# Altium PCB miaow-foc-board.pcbdoc (part 6 of 10)
Units mil, origin at the board's own origin, x right, y up, seen from the top; angles counter-clockwise.
Board outline 2755.91 x 3149.61 mil, 6 copper layers (SIG1, GND2, SIG3, PWR4, GND5, SIG6), stack 60.566 mil thick; 437 components, 392 nets, 2120 pads, 1697 vias.
Unrouted connection lines stored in the file: 1090.
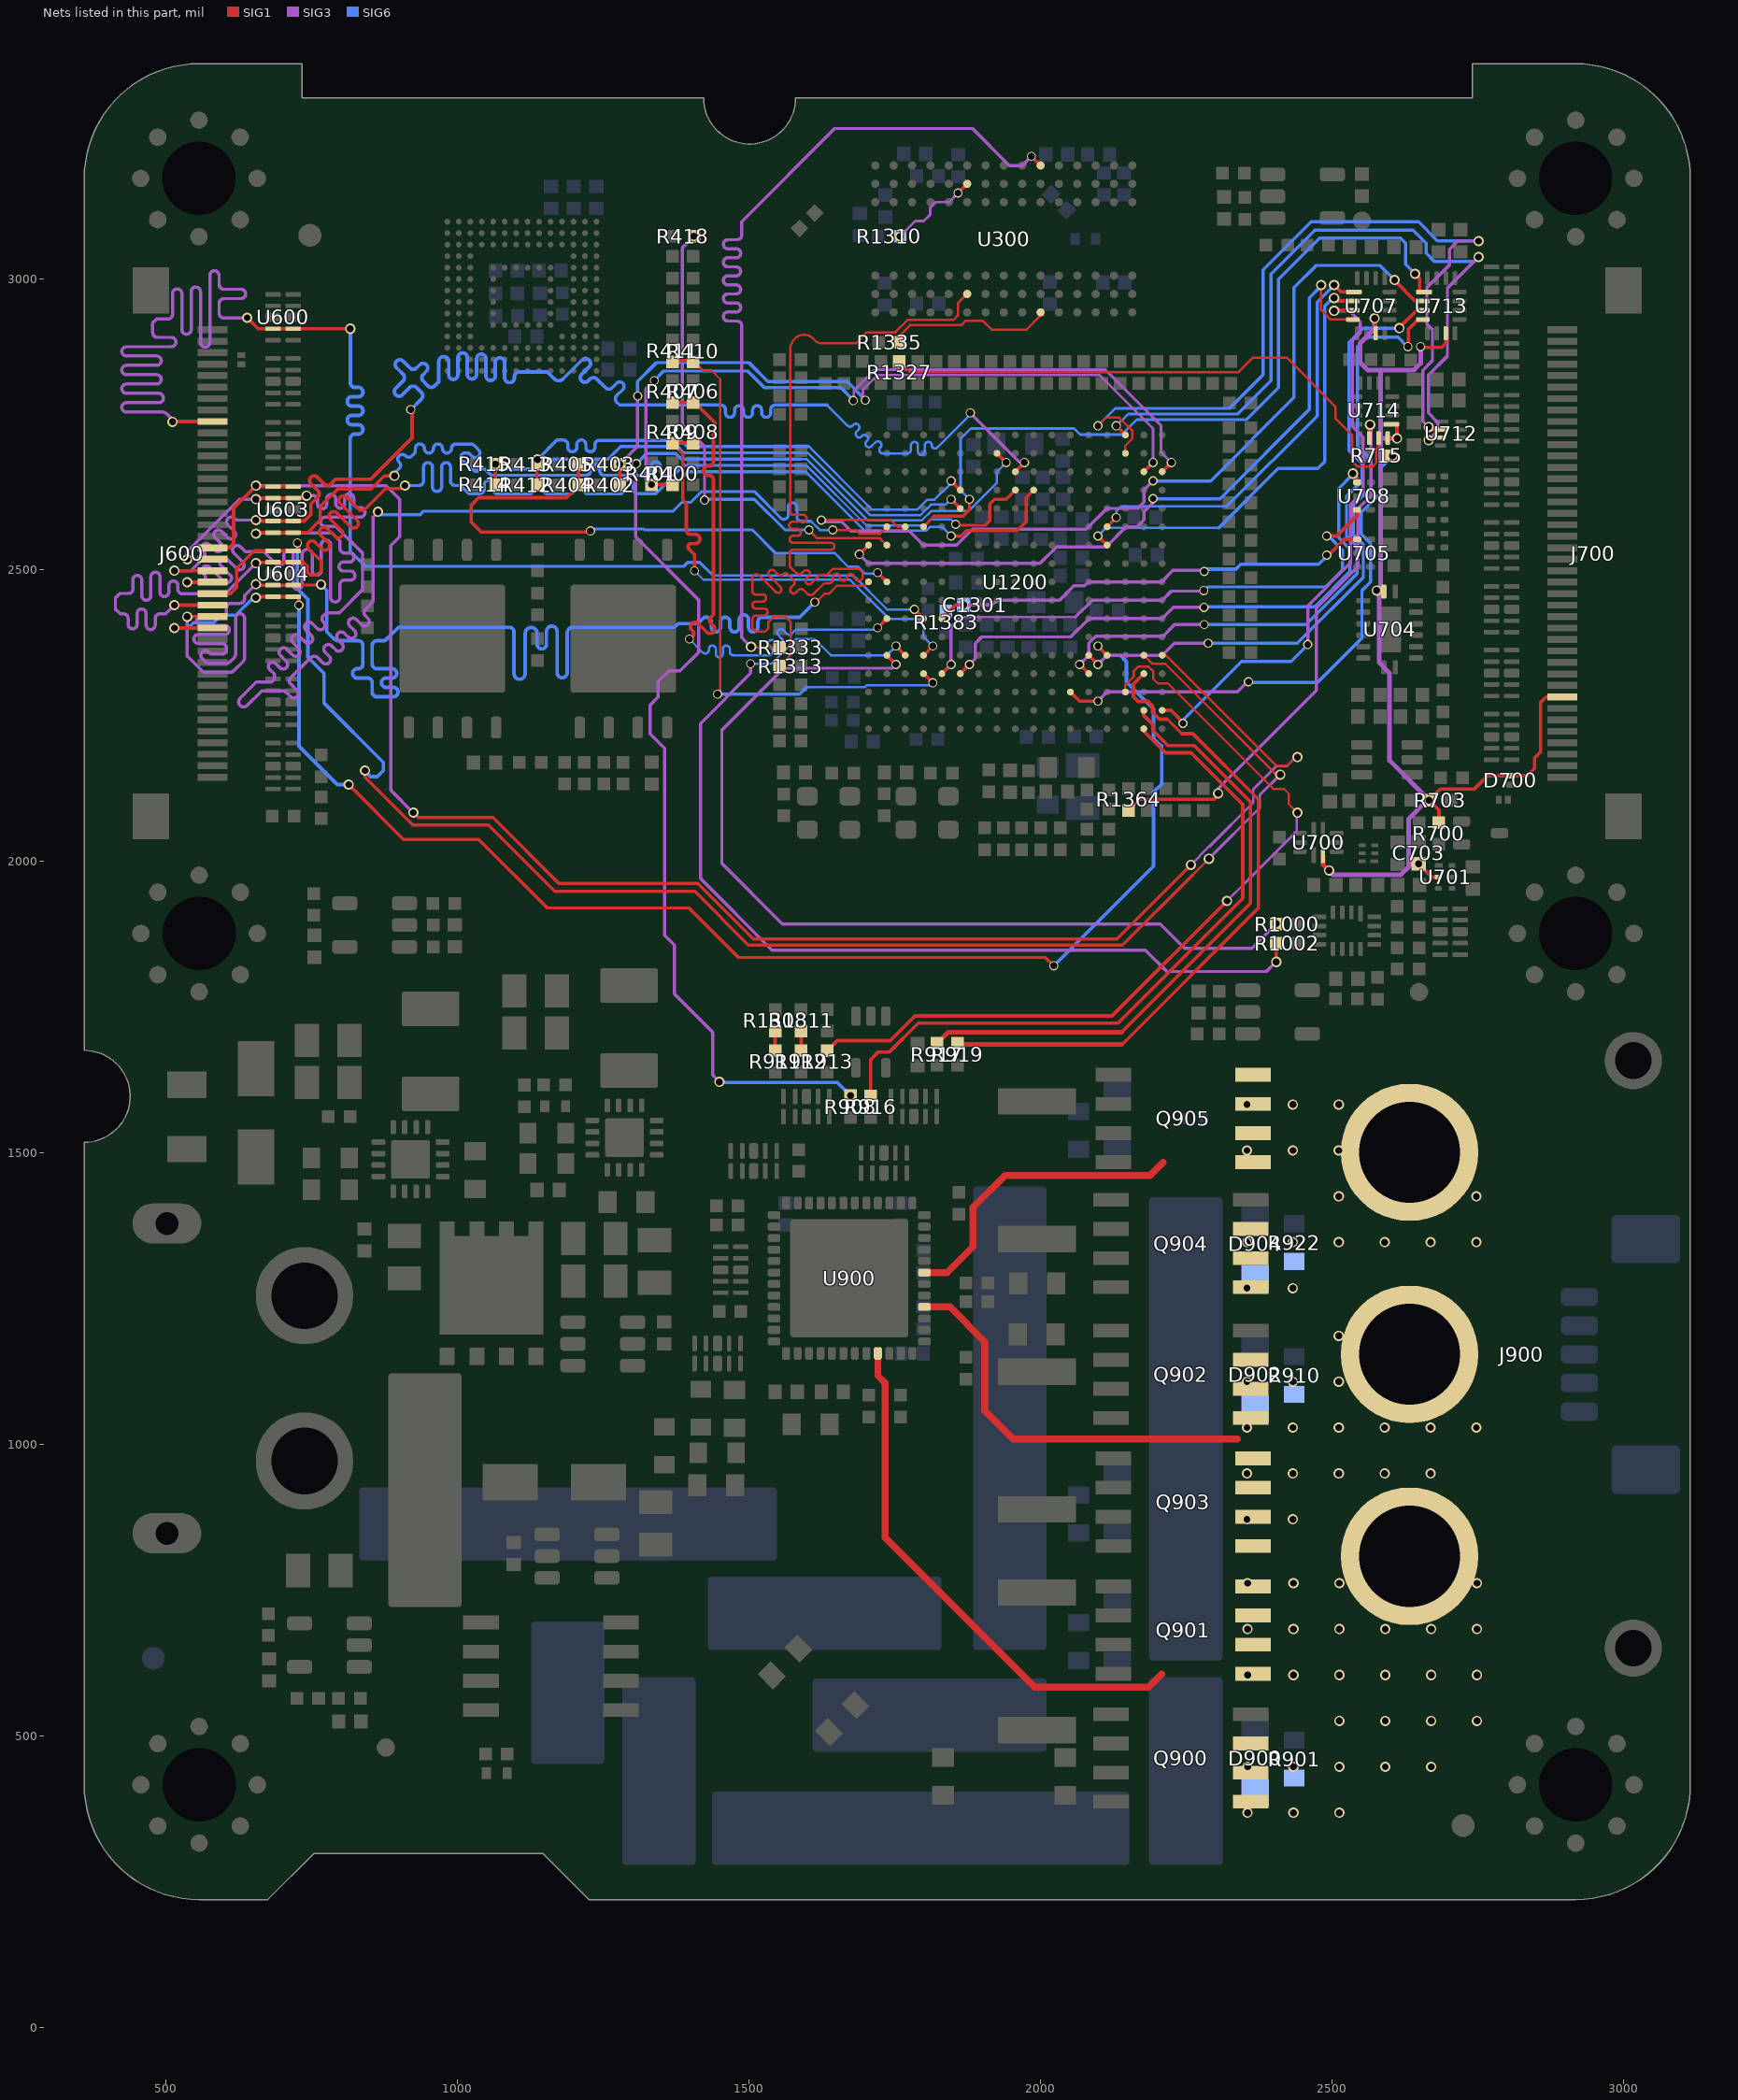
[diagram p9: the nets of this part, all layers, seen from the top]

## Via types
v1: diameter 17.72, hole 11.81, SIG1 to SIG6, tented both sides, 1223 vias
v2: diameter 15.75, hole 11.81, SIG1 to SIG6, tented both sides, 453 vias
v3: diameter 17.72, hole 11.81, SIG1 to SIG6, tented top, 21 vias

## Nets (pads, with @x,y where several pads share a name; then routed paths per layer and width w, separated by ;. In a path a pad name is that pad's centre, name@x,y a point inside that pad or via, vN(x,y) a via of type N, cw(c..) or ccw(c..) an arc to the next point about the centre after c; other vN are vias at no path point) (continued)
DBG_A_RX: U707.3 U1200.U2 | length 1007.7
  SIG1 w6: U1200.U2@2209.03,2259.35 2224.25,2259.35 2244.76,2238.83 v2(2244.76,2237.09) ; v1(2504.05,2944.6) 2505.21,2945.76 U707.3@2536.08,2945.76
  SIG3 w5.5: v2@2458.82,2375.27 2458.82,2438.84 2532.22,2512.24 2532.22,2612.87 2553.93,2634.58 2553.93,2728.3 2535.49,2746.75 2535.49,2893.67 2548.84,2907.03 2548.84,2926.16 2530.41,2944.6 v1(2504.05,2944.6)
  SIG6 w5.5: v2(2244.76,2237.09) 2245.87,2238.2 2245.87,2243.88 2345.59,2343.6 2430.15,2343.6 v2(2458.82,2372.27)
DBG_A_TX: U707.4 U1200.A11 | length 1248.8
  SIG1 w4: v1@2482.85,2988.22 2485.57,2985.5 2481.85,2981.77 2481.85,2946.38 2498.22,2930.01 U707.4@2536.08,2930.01
  SIG1 w6: v2(1689.34,2527.07) U1200.A11@1705.09,2542.81
  SIG3 w5.5: v2(1689.34,2527.07) 1705.03,2511.38 1999.37,2511.38 2027.86,2539.86 2112.52,2539.86 2147.23,2574.57 2166.5,2574.57 2177.97,2586.04 2177.97,2599.66 2193.28,2614.97 v2@2193.28,2621.55
  SIG6 w5.5: v2(2193.28,2622.55) 2308.55,2622.55 2461.76,2775.77 2461.76,2967.13 v1@2482.85,2988.22
  other v1: 2481.85,2988.94
DBG_B_RX: U707.1 U1200.P12 | length 721.1
  SIG1 w6: U1200.P12@2114.54,2574.31 v2(2130.29,2590.06) ; v1(2504.05,2988.94) 2515.74,2977.25 U707.1@2538.05,2977.25
  SIG6 w4: v2(2130.29,2590.06) 2130.29,2601.04 2138.33,2609.09 2319.72,2609.09
  SIG6 w5.5: 2319.72,2609.09 2474.98,2764.35 2474.98,2959.87 v1(2504.05,2988.94)
DBG_B_TX: U707.2 U1200.P11 | length 789.5
  SIG1 w6: v2(2098.79,2558.56) U1200.P11@2114.54,2542.81 ; v1@2503.09,2965.79 2503.09,2963.74 2504.94,2961.89 2534.04,2961.89 2535.25,2960.68 U707.2@2536.08,2961.51
  SIG6 w4: v2(2098.79,2558.56) 2112.41,2572.17 2305.85,2572.17
  SIG6 w5.5: 2305.85,2572.17 2407.79,2674.12 2476.28,2674.12 2488.2,2686.04 2488.2,2952.98 2498.86,2963.64 2503.09,2963.64 v1@2503.09,2965.79
  other v1: 2504.05,2966.79
DBG_C_RX: U713.3 U1200.N4 | length 1148.8
  SIG1 w6: v2(2067.3,2338.09) U1200.N4@2083.05,2322.34 ; v1(2616.04,2915.11) 2616.04,2915.96 2645.83,2945.76 U713.3@2656.37,2945.76
  SIG3 w5.5: v2(2067.3,2338.09) 2083.05,2353.84 2083.05,2374.39 2095.26,2386.61 2210.31,2386.61 2230.31,2406.61 v2(2281.27,2406.61)
  SIG6 w5.5: v2(2281.27,2406.61) 2456.14,2406.61 2543.1,2493.57 2543.1,2540.52 2525.27,2558.35 2525.27,2625.94 2551.74,2652.41 2551.74,2683.15 2529.86,2705.02 2529.86,2890.96 2553.84,2914.94 v1@2615.87,2914.94
DBG_C_TX: U713.4 U1200.N5 | length 1126
  SIG1 w6: U1200.N5@2083.05,2353.84 v2(2098.79,2338.09) ; v2(2630.62,2883.42) 2631.55,2884.35 2631.55,2912.99 2648.57,2930.01 U713.4@2656.37,2930.01
  SIG3 w5.5: v2(2098.79,2338.09) 2114.54,2353.84 2209.03,2353.84 2229.68,2374.48 v2(2287.94,2374.48)
  SIG6 w5.5: v2(2287.94,2374.48) 2440.84,2374.48 2554.13,2487.78 2554.13,2544 2537.15,2560.98 2537.15,2611 2567.76,2641.61 2567.76,2688.96 2544.12,2712.59 2544.12,2883.27 2560.19,2899.33 2613.67,2899.33 v2@2630.21,2882.79
DBG_D_RX: U713.1 U1200.D12 | length 1347.3
  SIG1 w5.5: U1200.D12@1799.58,2574.31 1818.09,2592.82 1867.43,2592.82 1878.32,2603.71 v2(1878.32,2621.55)
  SIG1 w6: v1(2642.86,3008.36) 2650.59,3000.64 2650.59,2977.81 2657.78,2977.81 U713.1@2658.34,2977.25
  SIG6 w4.5: v2(1878.32,2621.55) 1863.05,2636.83 1863.05,2725.49 1880.56,2743 2058.14,2743 2068.61,2732.53 2139.84,2732.53 2165.55,2758.23 2353.89,2758.23
  SIG6 w5.5: 2353.89,2758.23 2408.87,2813.21 2408.87,2999.32 2479.09,3069.54 2617.92,3069.54 2626.73,3060.72 2626.73,3024.49 v1(2642.86,3008.36)
DBG_D_TX: U713.2 U1200.C12 | length 1547.7
  SIG1 w4: v2@1624.38,2585.94 1743.28,2585.94 1754.91,2574.31 U1200.C12@1768.08,2574.31
  SIG1 w6: v1(2607.93,2997.51) 2607.64,2997.51 2607.64,2996.86 2642.99,2961.51 U713.2@2657.86,2961.51
  SIG3 w5.5: v2(1624.2,2585.76) 1626.8,2583.15 1658.87,2583.15 1674.8,2567.22 1775.18,2567.22 1799.58,2542.81 1856.44,2542.81 1883.43,2569.81 2078.54,2569.81 2114.54,2605.81 2167.27,2605.81 2177.87,2616.4 2177.87,2637.64 v2(2193.28,2653.05)
  SIG6 w5.5: v2(2193.28,2653.05) 2292.16,2653.05 2435.32,2796.21 2435.32,2984.4 2473.57,3022.65 2582.79,3022.65 v1(2607.93,2997.51)
DBG_MISO: R715.2 U1200.M3 | length 899.9
  SIG1 w6: U1200.M3@2051.55,2290.85 2067.3,2275.1 v2(2098.79,2275.1)
  SIG3 w5.5: v2(2098.79,2275.1) 2114.54,2290.85 2338.21,2290.85 v2@2355.84,2308.48
  SIG6 w5.5: v2@2356.06,2308.48 2357.33,2307.21 2475.62,2307.21 2551.78,2383.37 2551.78,2464.66 2566.88,2479.77 2566.88,2545.74 2550.84,2561.78 2550.84,2598.76 2583.96,2631.89 2583.96,2675.33 v1(2604.39,2695.76)
  other v2: 2357.06,2308.48
DBG_MOSI: R1364.2 U714.14 | length 933.8
  SIG1 w6: R1364.2@2151.4,2087.88 2170.45,2106.92 2298.62,2106.92 2305.4,2113.7 2305.4,2116.67 v1(2305.07,2117) ; U714.14@2564.63,2726.44 2564.63,2749.32 2564.81,2749.51 v1(2565.74,2749.51)
  SIG3 w5.5: v1(2305.07,2117) 2305.07,2125 2473.71,2293.63 2473.71,2434.55 2544.94,2505.77 2544.94,2605.22 2567.08,2627.36 2567.08,2748.16 v1(2565.74,2749.51)
DBG_SCL: U712.2 U1200.R16 | length 1443.3
  SIG1 w4: v2(2098.79,2747.54) 2112.97,2761.71 2135.12,2761.71 2157.95,2738.88 2157.95,2725.62 2146.04,2713.71 U1200.R16@2146.04,2700.29 ; v1(2666.04,2745.63) 2665.16,2744.75 v1@2668.85,2741.06
  SIG1 w6: v1@2668.85,2741.06 U712.2@2678.6,2741.06
  SIG3 w5.5: v1(2666.04,2745.63) 2656.08,2755.59 2656.08,2843 2672.78,2859.7 2672.78,2912.74 2663.15,2922.37 2663.15,2984.68 2701.93,3023.46 2701.93,3050.48 2715.82,3064.36 v1(2751.96,3064.36)
  SIG6 w4: v1@2751.73,3064.81 2752.07,3064.47 v1(2751.96,3064.36)
  SIG6 w4.5: v2(2098.79,2747.54) 2128.67,2777.42 2324.73,2777.42
  SIG6 w5.5: 2324.73,2777.42 2382.43,2835.12 2382.43,3015.18 2464.57,3097.31 2649,3097.31 2681.5,3064.81 v1@2751.73,3064.81
DBG_SCLK: R1327.2 U714.15 | length 998.7
  SIG1 w4: R1327.2@1757.78,2857.96 1775.98,2839.76 2340.3,2839.76 2364.99,2864.45 2422.46,2864.45 2506.83,2780.08 2506.83,2760.03 2534.98,2731.88 2534.98,2686.39 2543.44,2677.93 2570.38,2677.93 2576.16,2683.72 2576.16,2707.41 2577.14,2708.39 2577.28,2708.39 2579.79,2710.9 2579.79,2725.85 U714.15@2580.37,2726.44
DBG_SDA: U712.3 U1200.R17 | length 1299.5
  SIG1 w6: v2(2130.29,2747.54) U1200.R17@2146.04,2731.79 ; v1@2668.85,2727.28 U712.3@2678.6,2727.28
  SIG3 w5.5: v1(2666.04,2722.7) 2682.29,2738.95 2682.29,2753.2 2665.65,2769.84 2665.65,2834.4 2698.46,2867.21 2698.46,2983.65 v1(2751.96,3037.15)
  SIG6 w4.5: v2(2130.29,2747.54) 2150.69,2767.94 2338.8,2767.94
  SIG6 w5.5: 2338.8,2767.94 2395.65,2824.8 2395.65,3007.89 2471.19,3083.43 2639.67,3083.43 2661.99,3061.11 2661.99,3043.64 2675.97,3029.65 2744.46,3029.65 v1(2751.96,3037.15)
DE: J600.9 U600.2 U600.9 U1200.D7 | length 3247.2
  SIG1 w6: v1(510.97,2754.35) 511.52,2754.9 J600.9@579.29,2754.9 ; v1@638.97,2932.31 641.19,2932.31 641.19,2930.5 657.65,2914.05 U600.9@683.32,2914.05 U600.2@717.77,2914.05 815.34,2914.05 v1@815.78,2914.48 ; v2(1783.83,2432.58) U1200.D7@1799.58,2416.83
  SIG3 w5.5: v1(510.97,2754.35) 510.97,2758.09 501.83,2767.23 ccw(c492.17,2757.57) 492.17,2771.23 431.86,2771.23 cw(c431.86,2779.23) 431.86,2787.23 487.26,2787.23 ccw(c487.26,2795.23) 487.26,2803.23 431.86,2803.23 cw(c431.86,2811.23) 431.86,2819.23 483.55,2819.23 ccw(c483.55,2827.23) 483.55,2835.23 431.86,2835.23 cw(c431.86,2843.23) 431.86,2851.23 483.55,2851.23 ccw(c483.55,2859.23) 483.55,2867.23 431.86,2867.23 cw(c431.86,2875.23) 431.86,2883.23 508.76,2883.23 ccw(c508.76,2891.23) 508.76,2899.23 484.91,2899.23 cw(c484.91,2907.23) 476.91,2907.23 476.91,2924.14 483.53,2930.76 502.86,2930.76 ccw(c502.86,2938.76) 510.86,2938.76 510.86,2974.49 cw(c518.86,2974.49) 526.86,2974.49 526.86,2912.61 ccw(c534.86,2912.61) 542.86,2912.61 542.86,2977.67 cw(c550.86,2977.67) 558.86,2977.67 558.86,2890.53 ccw(c566.86,2890.53) 574.86,2890.53 574.86,3005.56 cw(c582.86,3005.56) 590.86,3005.56 590.86,2989.77 ccw(c598.86,2989.77) 598.86,2981.77 628.38,2981.77 cw(c628.38,2973.77) 628.38,2965.77 598.86,2965.77 ccw(c598.86,2957.77) 590.86,2957.77 590.86,2940.67 ccw(c599.11,2940.67) 599.11,2932.41 638.57,2932.41 v1(638.97,2932.81)
  SIG6 w4: 1437.82,2491.5 1437.82,2491 1678.41,2491 1736.84,2432.58 v2(1783.83,2432.58)
  SIG6 w5: 1415.53,2513.29 1437.32,2491.5 1437.82,2491.5
  SIG6 w5.5: 815.78,2532.58 842,2506.35 1387.97,2506.35 1394.91,2513.29 1415.53,2513.29
  SIG6 w6: 815.78,2532.58 815.78,2725.39 cw(c823.78,2725.39) 823.78,2733.39 829.72,2733.39 ccw(c829.72,2741.39) 829.72,2749.39 818.78,2749.39 cw(c818.78,2757.39) 818.78,2765.39 829.72,2765.39 ccw(c829.72,2773.39) 829.72,2781.39 818.78,2781.39 cw(c818.78,2789.39) 818.78,2797.39 829.72,2797.39 ccw(c829.72,2805.39) 829.72,2813.39 823.78,2813.39 cw(c823.78,2821.24) 815.93,2821.24 v1@815.93,2913.89
  other v1: 815.78,2914.05
DM0: R1333.2 U300.K9 | length 1638
  SIG1 w4: v1(1503.53,2368.23) 1503.53,2367.84 1504.32,2367.05 R1333.2@1552.33,2367.05
  SIG1 w6: v2(1984.62,3209.93) U300.K9@2000.37,3194.18
  SIG3 w5.5: v1(1503.53,2368.23) 1503.33,2368.03 1487.49,2383.88 1487.49,2885.81 1487.49,2919.56 ccw(c1479.74,2919.56) 1479.74,2927.31 1463.81,2927.31 cw(c1463.81,2935.06) 1463.81,2942.81 1477.97,2942.81 ccw(c1477.97,2950.56) 1477.97,2958.31 1463.81,2958.31 cw(c1463.81,2966.06) 1463.81,2973.81 1477.97,2973.81 ccw(c1477.97,2981.56) 1477.97,2989.31 1463.81,2989.31 cw(c1463.81,2997.06) 1463.81,3004.81 1477.97,3004.81 ccw(c1477.97,3012.56) 1477.97,3020.31 1463.81,3020.31 cw(c1463.81,3028.06) 1463.81,3035.81 1477.97,3035.81 ccw(c1477.97,3043.56) 1477.97,3051.31 1463.81,3051.31 cw(c1463.81,3059.06) 1463.81,3066.81 1479.74,3066.81 ccw(c1479.74,3074.56) 1487.49,3074.56 1487.49,3097.68 1647.37,3257.57 1883.64,3257.57 1947.02,3194.18 1968.87,3194.18 v2(1984.62,3209.93)
DM1: R1335.2 U300.K1 | length 286.9
  SIG1 w4: R1335.2@1759.67,2889.49 1759.67,2903.5 1776.48,2920.31 1864.4,2920.31 1872.04,2927.96 1901.01,2927.96 1916.49,2912.47 1976.24,2912.47 2000.37,2936.6 U300.K1@2000.37,2942.21
DM2: R1310.2 U300.F8 | length 159.7
  SIG1 w6: v2(1858.64,3146.94) U300.F8@1874.38,3162.69
  SIG3 w4.5: v1(1759.07,3072.42) 1785.44,3098.79 1799.82,3098.79 1810.78,3109.75 1810.78,3121.75 1820.22,3131.19 1842.89,3131.19 v2(1858.64,3146.94)
DM3: R1313.2 U300.F2 | length 1842.8
  SIG1 w4: R1313.2@1552.04,2335.11 1571.64,2354.71 1571.64,2410.82 1562.62,2419.84 1542.33,2419.84 1533.53,2411.04 1533.53,2400.35 1527.69,2394.5 1511.46,2394.5 1506.04,2399.92 1506.04,2416.07 cw(c1512.04,2416.07) 1512.04,2422.07 1526.03,2422.07 ccw(c1526.03,2428.07) 1526.03,2434.07 1511.85,2434.07 cw(c1511.85,2440.07) 1511.85,2446.07 1523.51,2446.07 ccw(c1523.51,2452.07) 1523.51,2458.07 1512.04,2458.07 cw(c1512.04,2464.07) 1506.04,2464.07 1506.04,2487 cw(c1512.65,2486.27) 1517.36,2490.98 1539.9,2468.43 1545.57,2462.76 ccw(c1549.82,2467) 1553.98,2471.33 1539.9,2485.4 1535.13,2490.17 cw(c1539.37,2494.42) 1539.9,2500.4 cw(c1539.37,2494.42) 1543.62,2498.66 1549.59,2492.69 ccw(c1553.83,2496.93) 1558.07,2492.69 ; 1558.17,2492.78 cw(c1562.41,2488.54) 1566.65,2492.78 1576.55,2482.88 cw(c1572.31,2478.64) 1576.55,2474.4 1572.27,2470.11 ccw(c1576.51,2465.87) 1580.75,2461.63 1585.04,2465.91 cw(c1589.28,2461.67) 1593.52,2465.91 1599.73,2459.71 ccw(c1605.69,2465.67) 1611.65,2459.71 1629.43,2477.49 1637.72,2477.49 ccw(c1637.72,2483.92) 1644.15,2483.92 1644.15,2488.22 cw(c1650.15,2488.22) 1656.15,2488.22 1656.15,2487.52 ccw(c1662.15,2487.52) 1662.15,2481.52 ccw(c1662.15,2487.52) 1668.15,2487.52 1668.15,2487.63 cw(c1674.15,2487.63) 1680.15,2487.63 1680.15,2487.52 1686.09,2481.58 1690.51,2481.58 1694.88,2485.95 1694.88,2495.97 1688.58,2502.27 1644.13,2502.27 1633.26,2491.4 1621.23,2491.4 1607.25,2477.41 cw(c1603,2481.65) 1598.76,2485.9 1602.58,2489.71 ccw(c1598.33,2493.96) 1594.09,2498.2 1590.39,2494.5 cw(c1586.15,2498.74) 1581.91,2494.5 1571.52,2504.88 cw(c1575.77,2509.12) 1569.77,2509.12 1569.77,2528.81 cw(c1575.77,2528.81) 1575.77,2534.81 1640.63,2534.81 ccw(c1640.63,2540.81) 1640.63,2546.81 1575.77,2546.81 cw(c1575.77,2552.81) 1569.77,2552.81 cw(c1575.77,2552.81) 1575.77,2558.81 1582.85,2558.81 ccw(c1582.85,2564.81) 1582.85,2570.81 1574.79,2570.81 cw(c1574.79,2576.81) 1574.79,2582.81 1592.86,2582.81 ccw(c1592.86,2588.81) 1592.86,2594.81 1575.77,2594.81 cw(c1575.77,2599.96) 1570.62,2599.96 1570.62,2877.32 cw(c1598.94,2877.32) 1578.91,2897.35 cw(c1594.47,2881.79) 1610.03,2897.35 1614.2,2893.18 ccw(c1624.28,2903.26) 1624.28,2889 1683.25,2889 1701.99,2907.74 1750.89,2907.74 1772.06,2928.91 1850.72,2928.91 1858.57,2936.76 1858.57,2957.9 U300.F2@1874.38,2973.71
DRV_CS: R911.1 R1308.2 | length 33.1
  SIG1 w4: R1308.2@1544.84,1708.73 R1308.2@1544.99,1708.88
  SIG1 w6: R911.1@1544.84,1675.8 R1308.2@1544.84,1708.73
DRV_FLT: R908.1 U1200.H16 | length 2193.2
  SIG1 w6: U1200.H16@1925.56,2700.29 v2(1941.31,2684.55)
  SIG3 w5.5: v2@1306.78,2677.03 1305.57,2675.82 1305.57,2556.98 1413.4,2449.15 1413.4,2358.77 1381.98,2327.36 1363.17,2327.36 1344.32,2308.51 1344.32,2282.32 1330.35,2268.34 1330.35,2219.04 1355.27,2194.12 1355.27,1873.37 1371.81,1856.83 1371.81,1772.85 1437.55,1707.12 1437.55,1633.55 v1(1449.11,1621.98)
  SIG6 w4: 1588.68,2690.32 1599.01,2690.32 1703.73,2585.6 1797.01,2585.6 1813.07,2601.66 1877.36,2601.66 1925.56,2649.87 1925.56,2668.8 v2(1941.31,2684.55)
  SIG6 w5: 1383.89,2690.32 1588.68,2690.32
  SIG6 w5.5: v2(1306.78,2682.59) 1324.31,2700.13 1374.08,2700.13 1383.89,2690.32
  SIG6 w6: v1(1449.11,1621.98) 1450.15,1620.94 1651.47,1620.94 v1(1674.13,1598.29)
DRV_PHASE_A: D900.1 J900.3 Q900.1 Q900.2 Q900.3 Q901.5 Q901.6 Q901.7 Q901.8 R901.1 U900.9 | length 912.1
  SIG1 w12: U900.9@1721.18,1156.1 1721.18,1117.87 1733.48,1105.57 1733.48,839.84 1990.11,583.21 2186.06,583.21 2208.56,605.71
  other v1: 2355.56,368.18 2434.3,368.18 2513.04,368.18 2355.56,446.92 2434.3,446.92 2513.04,446.92 2591.78,446.92 2670.52,446.92 2513.04,525.66 2591.78,525.66 2670.52,525.66 2749.26,525.66 2355.56,604.4 2434.3,604.4 2513.04,604.4 2591.78,604.4 2670.52,604.4 2749.26,604.4 2355.56,683.14 2434.3,683.14 2513.04,683.14 2591.78,683.14 2670.52,683.14 2749.26,683.14 2355.56,761.88 2434.3,761.88 2513.04,761.88 2749.26,761.88
DRV_PHASE_B: D902.1 J900.2 Q902.1 Q902.2 Q902.3 Q903.5 Q903.6 Q903.7 Q903.8 R910.1 U900.16 | length 700.4
  SIG1 w12: U900.16@1800.91,1235.82 1844.72,1235.82 1904.66,1175.88 1904.66,1057.89 1953.22,1009.33 2338.34,1009.33
  other v1: 2354.56,871.41 2433.3,871.41 2354.56,950.15 2433.3,950.15 2512.04,950.15 2590.78,950.15 2669.52,950.15 2354.56,1028.89 2433.3,1028.89 2512.04,1028.89 2590.78,1028.89 2669.52,1028.89 2748.26,1028.89 2354.56,1107.63 2433.3,1107.63 2512.04,1107.63 2512.04,1186.37
DRV_PHASE_C: D904.1 J900.1 Q904.1 Q904.2 Q904.3 Q905.5 Q905.6 Q905.7 Q905.8 R922.1 U900.19 | length 550.6
  SIG1 w12: U900.19@1800.91,1294.88 1839.87,1294.88 1884.71,1339.72 1884.71,1407.02 1939.38,1461.69 2188.2,1461.69 2210.58,1484.07 ; Q905.5@2341.92,1484.07 2353.96,1484.07 Q905.5@2365.11,1484.07
  other v1: 2354.56,1268.14 2433.3,1268.14 2354.56,1346.88 2433.3,1346.88 2512.04,1346.88 2590.78,1346.88 2669.52,1346.88 2748.26,1346.88 2512.04,1425.62 2748.26,1425.62 2354.56,1504.36 2433.3,1504.36 2512.04,1504.36 2354.56,1583.1 2433.3,1583.1 2512.04,1583.1
DRV_SCLK: R912.1 R1311.2 | length 33.1
  SIG1 w6: R912.1@1589.68,1675.8 R1311.2@1589.68,1708.87
DRV_SDO: R913.1 U1200.R3 | length 1444.4
  SIG1 w4: U1200.R3@2146.04,2290.85 2146.04,2303.1 2159.81,2316.88 2159.81,2326.19 2167.97,2334.35 2185.83,2334.35 2193.48,2326.7 2193.48,2313.56 2201.52,2305.53 2218.88,2305.53 2400,2124.41 2418.25,2124.41 2426.24,2116.41 2426.24,2098.4 v1(2441.05,2083.6)
  SIG1 w6: R913.1@1634.52,1675.8 1651.25,1692.53 1742.5,1692.53 1785.06,1735.09 2122.97,1735.09 v1(2320.36,1932.47)
  SIG3 w4: v1(2320.36,1932.47) 2351.2,1963.32
  SIG3 w4.5: 2351.2,1963.32 2440.05,2052.17 2440.05,2080.49 2445.86,2080.49 v1@2445.86,2081.58
DRV_SNS_A: R916.1 U1200.T1 | length 1203.8
  SIG1 w6: R916.1@1708.66,1597.92 1708.66,1659.76 1722.12,1673.22 1741.01,1673.22 1790.46,1722.68 2133.14,1722.68 2347.31,1936.85 2347.31,2098.06 2258.79,2186.58 2214.65,2186.58 2175.95,2225.28 2175.95,2226.27 U1200.T1@2177.53,2227.85
DRV_SNS_B: R917.1 U1200.T2 | length 1070.4
  SIG1 w6: 2139.4,1707.35 2360.64,1928.59 2360.64,2102.29 2264.01,2198.92 2219.03,2198.92 2193.28,2224.67 2193.28,2234.73 2177.53,2250.48 U1200.T2@2177.53,2259.35
  SIG1 w8: R917.1@1822.84,1687.99 1842.2,1707.35 2139.4,1707.35
DRV_SNS_C: R919.1 U1200.T4 | length 1141.5
  SIG1 w5: 2217.76,2244.35 2242.65,2219.46
  SIG1 w6: R919.1@1857.61,1687.99 R919.1@1859.58,1686.02 ; 2139.97,1686.02 2374.14,1920.2 2374.14,2106.67 2261.35,2219.46 2242.65,2219.46 ; U1200.T4@2177.53,2322.34 2159.55,2304.36 2159.55,2282.92 2167.89,2274.57 2184.59,2274.57 2192.63,2266.53 2192.63,2255.99 2204.27,2244.35 2217.76,2244.35
  SIG1 w8: R919.1@1859.58,1686.02 2139.97,1686.02
EMMC_CLK: R418.1 U1200.B11 | length 823.8
  SIG1 w4: v2(1602.85,2568.83) 1616.85,2554.83 1724.58,2554.83 U1200.B11@1736.59,2542.81
  SIG3 w5.5: v1(1405.34,3072.53) 1385.97,3053.16 1385.97,2749.85 1423.75,2712.07 v2(1423.75,2620)
  SIG6 w5: v2(1423.75,2620) 1422.91,2620.84 1423.58,2621.5 1509.31,2621.5 1561.92,2568.89 v2@1602.78,2568.89
EMMC_D0: R400.2 R401.1 U1200.U15 | length 1286.4
  SIG1 w6: v1(1333.04,2646.61) R400.2@1368.83,2646.61 ; U1200.U15@2209.03,2668.8 v2(2224.78,2684.55)
  SIG3 w4.5: v2@1679.9,2790.76 1679.9,2807.91 1715.89,2843.9 2111.2,2843.9 2206.93,2748.18 2206.93,2702.4 v2(2224.78,2684.55)
  SIG3 w5.5: v1(1333.04,2646.61) 1323.43,2656.22 1323.43,2811.1 v2(1337.52,2825.19)
  SIG6 w5.5: v2(1337.52,2825.19) 1353.85,2841.52 1497.66,2841.52 1526.33,2812.85 1657.82,2812.85 v2@1679.9,2790.76
  other v2: 1678.9,2790.76
EMMC_D1: R402.2 R403.1 U1200.T15 | length 1271.3
  SIG1 w6: R402.2@1278.55,2646 v1(1278.55,2681.61) ; U1200.T15@2177.53,2668.8 v2(2193.28,2684.55)
  SIG3 w4.5: v2@1698.64,2791.27 1695.37,2791.27 1695.37,2809.17 1721.03,2834.83 2101.29,2834.83 2193.28,2742.83 v2(2193.28,2684.55)
  SIG3 w5.5: v1(1278.55,2681.61) 1308.9,2711.96 v2@1308.9,2798.56
  SIG6 w4: v2@1695.37,2796.57 1695.37,2791.27 v2@1698.64,2791.27
  SIG6 w5.5: v2@1308.67,2799.03 1308.67,2823.44 1341.17,2855.95 1499.94,2855.95 1532.33,2823.56 1668.38,2823.56 v2@1695.37,2796.57
  other v2: 1699.64,2791.27 1309.02,2798.68
EMMC_D2: R404.2 R405.1 U1200.B9 | length 1029.4
  SIG1 w6: R405.1@1207.36,2681.61 R404.2@1207.36,2646 1207.36,2644.94 1186.72,2624.31 1036.2,2624.31 1023.51,2611.63 1023.51,2582.19 1040.53,2565.17 1225.96,2565.17 v2(1227.94,2567.16) ; v2(1720.84,2495.57) U1200.B9@1736.59,2479.82
  SIG6 w4: v2(1227.94,2567.16) 1227.94,2564.36 1228.32,2563.99 1235.02,2570.69 ; 1545.22,2529.41 1646.56,2529.41 1669.94,2506.04 1687.26,2506.04 1699.39,2493.9 1719.17,2493.9 v2(1720.84,2495.57)
  SIG6 w5: 1235.02,2570.69 1318.94,2570.69 1320.44,2569.18 1505.45,2569.18 1545.22,2529.41
EMMC_D3: R406.2 R407.1 U1200.B7 | length 1030.8
  SIG1 w6: R407.1@1368.5,2787.56 R406.2@1404.29,2787.56 1406.82,2787.56 1441.33,2753.04 1441.33,2740.2 1438.85,2737.72 1438.85,2686.22 cw(c1430.98,2686.22) 1429.97,2678.41 ccw(c1429.97,2670.41) 1429.97,2662.41 cw(c1431.01,2654.35) 1439.13,2654.35 1439.13,2423.29 1434.29,2418.44 ccw(c1438.83,2413.89) 1434.29,2409.35 1438.67,2404.96 cw(c1433.01,2399.3) 1427.35,2393.64 1412.97,2408.01 ccw(c1407.4,2402.44) 1401.83,2396.87 1403.47,2395.23 cw(c1399.23,2390.99) 1403.47,2386.75 1398.43,2381.7 v2(1397.64,2381.7) ; v2(1720.84,2401.08) U1200.B7@1736.59,2416.83
  SIG6 w4: v2(1397.64,2381.7) 1420.84,2358.5 ccw(c1425.09,2362.74) 1431.09,2362.74 1431.09,2364.49 cw(c1437.09,2364.49) 1443.09,2364.49 1443.09,2356.62 ccw(c1449.09,2356.62) 1455.09,2356.62 1455.09,2364.49 cw(c1461.09,2364.49) 1467.09,2364.49 1467.09,2359.87 ccw(c1473.09,2359.87) 1473.09,2353.87 1536.3,2353.87 1539.34,2356.91 ccw(c1535.1,2361.15) 1539.34,2365.39 1534.88,2369.85 cw(c1539.12,2374.09) 1539.9,2380.04 cw(c1539.12,2374.09) 1543.37,2378.34 1547.83,2373.88 ccw(c1552.05,2378.14) 1556.31,2382.36 1550.45,2388.23 cw(c1554.69,2392.47) 1558.93,2396.71 1564.8,2390.85 ccw(c1569.04,2395.09) 1573.28,2390.85 1580.52,2398.08 1718.84,2398.08 v2@1719.88,2399.12
EMMC_D4: R408.2 R409.1 U1200.D5 | length 786.7
  SIG1 w5: R409.1@1375.41,2710.05 1386.46,2699 1386.46,2620.54
  SIG1 w6: R409.1@1368.5,2717.92 R408.2@1404.29,2717.92 ; 1386.46,2620.54 1392.63,2614.38 1392.63,2568.39 ccw(c1399.75,2568.39) 1399.75,2561.27 1407.68,2561.27 cw(c1407.68,2553.27) 1407.68,2545.27 1400.81,2545.27 ccw(c1400.81,2539.88) 1397,2536.06 1406.6,2526.46 v2(1406.6,2498.69) ; U1200.D5@1799.58,2353.84 v2(1815.33,2369.59)
  SIG6 w4: v2(1406.6,2498.69) 1421.79,2483.5 1673.28,2483.5 1740.2,2416.58 1789.58,2416.58 1799.58,2406.58 1799.58,2385.33 v2(1815.33,2369.59)
EMMC_D5: R410.2 R411.1 U1200.D4 | length 1037.2
  SIG1 w4: R410.2@1404.29,2859.19 1421.44,2842.05 1436.13,2842.05 1450.66,2827.52 ; v2(1446.03,2287.11) v2@1450.66,2291.74 ; v2@1450.44,2291.74 1450.44,2827.52
  SIG1 w6: R411.1@1368.5,2859.19 R410.2@1404.29,2859.19 ; U1200.D4@1799.58,2322.34 v2(1815.33,2306.59)
  SIG6 w4: 1598.76,2298.81 1698.62,2298.81 1702.16,2302.35 1811.09,2302.35 v2(1815.33,2306.59)
  SIG6 w6: v2(1446.03,2287.11) 1587.07,2287.11 1598.76,2298.81
EMMC_D6: R412.2 R413.1 U1200.F14 | length 915.8
  SIG1 w5.5: R413.1@1136.17,2681.61 1136.17,2688.84 v1(1136.95,2689.61)
  SIG1 w6: R412.2@1136.17,2646 R413.1@1136.17,2681.61 ; v2(1846.82,2653.05) U1200.F14@1862.57,2637.3
  SIG6 w4: 1602.58,2712.12 1711.14,2603.56 1788.73,2603.56 1806.21,2621.04 1818.46,2621.04 1846.82,2649.4 v2(1846.82,2653.05)
  SIG6 w5: 1393.47,2712.12 1602.58,2712.12
  SIG6 w5.5: v1(1136.95,2689.61) 1170.46,2723.12 1181.4,2723.12 cw(c1181.4,2715.37) 1189.15,2715.37 1189.15,2710.72 ccw(c1196.9,2710.72) 1204.65,2710.72 1204.65,2715.54 cw(c1212.4,2715.54) 1220.15,2715.54 1220.15,2710.72 ccw(c1227.9,2710.72) 1235.65,2710.72 1235.65,2715.37 cw(c1242.71,2715.37) 1242.71,2722.43 1383.15,2722.43 1393.47,2712.12
EMMC_D7: R414.2 R415.1 U1200.F13 | length 936.5
  SIG1 w6: R414.2@1064.98,2646 v1(1064.98,2681.61) ; v2(1846.82,2621.55) U1200.F13@1862.57,2605.81
  SIG6 w4: v1(1064.98,2681.61) 1072.7,2673.9 ; 1590.77,2701.15 1601.02,2701.15 1707.62,2594.56 ; 1707.62,2594.58 1794.5,2594.58 1812.31,2612.39 1837.66,2612.39 v2(1846.82,2621.55)
  SIG6 w5: 1388.1,2701.15 1590.77,2701.15
  SIG6 w5.5: 1072.7,2673.9 1144.09,2673.9 1160.87,2690.68 1186.26,2690.68 cw(c1186.26,2682.93) 1194.01,2682.93 1194.01,2682.72 ccw(c1201.76,2682.72) 1209.51,2682.72 1209.51,2682.93 cw(c1217.26,2682.93) 1217.26,2690.68 1258.51,2690.68 1279.6,2711.78 1377.47,2711.78 1388.1,2701.15
EN: C703.1 D700.2 J700.8 R700.2 R703.2 U700.2 U701.2 U704.9 U707.7 U713.7 U714.1 U714.16 | length 1958.3
  SIG1 w6: v1(2573.7,2931.98) 2575.45,2930.24 U707.7@2575.45,2906.39 ; v1(2577.24,2465.04) 2577.31,2464.97 U704.9@2587.26,2464.97 ; U714.16@2596.12,2726.44 2608.22,2726.44 v1@2608.87,2725.8 ; U714.1@2602.03,2750.06 2612.01,2750.06 v1(2612.01,2725.95) 2611.86,2725.8 v1@2608.22,2725.8 ; v1(2649.18,1995.94) 2671.69,1973.44 U701.2@2682.84,1973.44 ; v2@2652.48,2883.29 2653.72,2882.05 2658.94,2882.05 2688.72,2882.05 2695.74,2889.08 U713.7@2695.74,2906.39 ; R700.2@2683.83,2067.05 2683.83,2088.34 v1(2666.99,2105.18) 2686.01,2124.21 2744.15,2124.21 2767.31,2147.37 2803.2,2147.37 2803.32,2147.24 2835.66,2147.24 2848.04,2159.62 2848.04,2177.77 2858.5,2188.23 2858.5,2272.99 2867.96,2282.46 J700.8@2895.33,2282.46
  SIG1 w8: U700.2@2484.82,2007.99 2484.82,1994.29 2494.89,1984.23 v1(2495.46,1984.8)
  SIG3 w8: v1(2495.46,1984.8) 2495.5,1984.76 2495.5,1983.01 2500.87,1977.64 2618.74,1977.64 2632.08,1990.97 2632.08,1996.28 ; v1(2573.7,2931.98) 2573.7,2914.51 2548.66,2889.46 2548.66,2856.26 2561.43,2843.49 2583.46,2843.49 ; 2584.12,2725.8 2611.86,2725.8 v1(2612.01,2725.95) ; v1(2649.18,1995.94) 2632.41,1995.94 2632.08,1996.28 ; v2@2652.48,2883.29 2652.48,2854.71 2641.26,2843.49 2583.46,2843.49 ; v1(2666.99,2105.18) 2663.82,2105.18 2632.08,2073.44 2632.08,1996.28 ; v1@2666.99,2105.5 2599.29,2173.2 2599.29,2323.44 2581.12,2341.61 2581.12,2461.16 v1(2577.24,2465.04) 2583.46,2471.27 2583.46,2725.8 2583.46,2843.49
  other v2: 2652.48,2883.42
ENC_A: R1000.1 U1200.B5 | length 1625.9
  SIG1 w4: R1000.1@2398.69,1893.33 2398.69,1892.78 R1000.1@2398.75,1892.72
  SIG1 w6: U1200.B5@1736.59,2353.84 v2(1752.34,2338.09)
  SIG3 w5.5: v2(1752.34,2338.09) 1745.89,2331.64 1559.6,2331.64 1453.44,2225.48 1453.44,1996.79 1557.37,1892.86 2205.96,1892.86 2247.57,1851.26 2363.29,1851.26 v1@2404.75,1892.72
  other v1: 2404.69,1893.33
ENC_B: R1002.1 U1200.C5 | length 1804.6
  SIG1 w6: v2(1752.34,2369.59) U1200.C5@1768.08,2353.84 ; v1@2404.75,1827.83 R1002.1@2404.75,1860.11
  SIG3 w5.5: v2(1502.61,2339.22) 1502.69,2339.14 1502.69,2322.91 1416.62,2236.85 1416.62,1970.92 1539.61,1847.94 2180.48,1847.94 2217.1,1811.32 2387.7,1811.32 v1@2404.15,1827.78
  SIG6 w4: v2(1502.61,2339.22) 1538.39,2339.22 1581.15,2381.98 1612.45,2381.98 1640.59,2353.84 1736.59,2353.84 v2(1752.34,2369.59)
  other v1: 2404.69,1827.78
FR_DBG1: C1301.1 R1383.1 U705.4 U1200.E7 | length 810.4
  SIG1 w6: U1200.E7@1831.08,2416.83 1854.55,2440.31 v2(1868.4,2440.31) ; v2(2491.41,2525.57) 2494.54,2525.57 2521.77,2552.8 U705.4@2543.79,2552.8
  SIG3 w5.5: v2(1868.4,2440.31) 1917.55,2440.31 1925.56,2448.33 2033,2448.33 2057.53,2472.86 2076.08,2472.86 2083.05,2479.82 2207.78,2479.82 2227.29,2499.33 2280.2,2499.33 2281.21,2498.32 v2(2281.21,2497.52)
  SIG6 w4: R1383.1@1837.05,2429.58 1843.57,2429.58 1854.3,2440.31 v2(1868.4,2440.31)
  SIG6 w6: v2(2281.21,2497.52) 2280.2,2498.52 2280.2,2499.33 2282.5,2501.63 2335.34,2501.63 2343.61,2509.9 2477.59,2509.9 2491.41,2523.72 v2(2491.41,2525.57)
FR_DBG2: U708.6 U1200.E4 | length 946.2
  SIG1 w6: U1200.E4@1831.08,2322.34 v2(1846.82,2338.09) ; v2(2491.41,2558.53) 2508.39,2558.53 2543.63,2593.77 U708.6@2543.63,2603.17
  SIG3 w4: 1863.7,2419.13 2060.14,2419.13
  SIG3 w5.5: v2(1846.82,2338.09) 1846.82,2402.17 1855.86,2411.21 1855.86,2411.3 1863.7,2419.13 ; 2060.14,2419.13 2089.34,2448.33 2209.03,2448.33 2224.63,2463.93 v2@2280.33,2463.93
  SIG6 w5.5: v2@2280.33,2463.93 2287.48,2471.08 2489.44,2471.08 2518.58,2500.22 2518.58,2534.18 2494.23,2558.53 v2(2491.41,2558.53)
  other v2: 2280.33,2464.93
FR_DBG3: U708.4 U1200.F4 | length 960.5
  SIG1 w6: U1200.F4@1862.57,2322.34 v2(1878.32,2338.09) ; v1(2536.16,2665.54) 2543.63,2658.06 U708.4@2543.63,2650.41
  SIG3 w5.5: v2(1878.32,2338.09) 1888.01,2347.78 1888.01,2374.13 1899.22,2385.33 2052.07,2385.33 2083.05,2416.31 2083.05,2416.83 2209.03,2416.83 2228.21,2436.01 v2(2280.83,2436.01)
  SIG6 w5.5: v2(2280.83,2436.01) 2282.11,2437.3 2471.08,2437.3 2531.42,2497.64 2531.42,2535.97 2511.94,2555.45 2511.94,2640.02 v1@2536.47,2664.54
G0: J600.24 U604.1 U604.10 U1200.T5 | length 2858
  SIG1 w4: U1200.T5@2177.53,2353.84 2192.45,2338.92 2214.6,2338.92 2402.35,2151.18 v1@2411.74,2151.18 ; 2261.52,1977.2 v1(2289.19,2004.87)
  SIG1 w5.5: v1(841.26,2156.17) 841.26,2144.78 923.23,2062.81 1052.73,2062.81 1167.03,1948.51 1407.15,1948.51 1498.93,1856.73 2141.05,1856.73 2261.52,1977.2
  SIG1 w6: J600.24@579.29,2459.62 610.36,2459.62 621.02,2470.28 621.02,2502.86 651.26,2533.1 U604.1@683.32,2533.1 U604.10@717.77,2533.1 727.1,2533.1 727.1,2546.72 v2(725.22,2546.72)
  SIG3 w4.5: v1(2289.19,2004.87) 2376.46,2092.14 2376.46,2113.89 v1(2411.74,2149.18)
  SIG6 w6: v2(725.22,2546.72) 725.22,2467.7 743.16,2449.76 743.16,2350.36 770.96,2322.55 770.96,2271.59 872.47,2170.08 872.47,2156.21 862.02,2145.76 850.7,2145.76 841.26,2155.2 v1(841.26,2156.17)
G1: J600.20 U603.1 U603.10 U1200.U5 | length 3098.7
  SIG1 w4: U1200.U5@2209.03,2353.84 2215.07,2353.84 2404.8,2164.11 2423.19,2164.11 v1@2440.05,2180.97
  SIG1 w5.5: v1(924.05,2083.82) 932.58,2075.29 1060.96,2075.29 1173.69,1962.57 1411.87,1962.57 1507.35,1867.09 2131.11,1867.09 v1(2258.41,1994.4)
  SIG1 w6: J600.20@579.29,2538.36 608.37,2538.36 615.79,2545.78 615.79,2606.65 v1(653.99,2644.85) ; v1@655.74,2643.1 U603.1@683.32,2643.1 U603.10@717.77,2643.1
  SIG3 w4: v1(2258.41,1994.4) 2289.09,2025.08
  SIG3 w4.5: 2289.09,2025.08 2365.48,2101.46 2365.48,2124.31 2405.36,2164.2 2423.28,2164.2 v1@2440.05,2180.97
  SIG3 w5.5: v1(653.99,2644.85) 877.52,2644.85 900.62,2621.75 900.62,2557.21 885.43,2542.02 885.43,2122.44 v1(924.05,2083.82)
  other v1: 2441.05,2178.97
G2: J600.27 U604.5 U604.6 U1200.P5 | length 2702.7
  SIG1 w5.5: v1(813.16,2132.02) 907.34,2037.84 1036.47,2037.84 1153.9,1920.41 1396.93,1920.41 1481.99,1835.35 2008.86,1835.35 v2(2023.11,1821.1)
  SIG1 w6: v1(514.16,2400.57) J600.27@579.29,2400.57 ; v1@655.74,2454.36 U604.5@683.32,2454.36 U604.6@717.77,2454.36 ; v2(727.75,2439.93) 727.75,2453.46 U604.6@728.65,2454.36 ; v2(2098.79,2369.59) U1200.P5@2114.54,2353.84
  SIG6 w4: 2194.34,2212.4 2208.22,2198.52
  SIG6 w5.5: v1(514.16,2400.57) 537.86,2400.57 546.99,2409.7 581.35,2409.7 594.37,2422.71 619.43,2422.71 649.33,2452.61 v1(653.99,2452.61)
  SIG6 w6: v2(727.75,2439.93) 727.75,2197.84 793.58,2132.02 v1(813.16,2132.02) ; v2(2023.11,1821.1) 2194.2,1992.19 2194.2,2119 2208.22,2133.01 2208.22,2198.52 ; v2(2098.79,2369.59) 2114.54,2353.84 2136.92,2353.84 2147.69,2343.06 2147.69,2308.13 2194.34,2261.48 2194.34,2212.4
G3: J600.26 U604.4 U604.7 U1200.A9 | length 2852.3
  SIG1 w4: v2(1612.9,2445.06) 1615.16,2445.06 1629.43,2459.32 1637.03,2459.32 1650.79,2473.08 1698.35,2473.08 U1200.A9@1705.09,2479.82
  SIG1 w5.5: U604.7@718.02,2474.3 765.59,2474.3 765.59,2475.32 v1(765.52,2475.39)
  SIG1 w6: v1@536.18,2420.25 J600.26@579.29,2420.25 ; v1@655.74,2474.05 U604.4@683.32,2474.05 U604.7@717.77,2474.05
  SIG3 w5.5: v1(536.03,2420.1) 536.03,2352.27 537.97,2350.33 561.29,2327.01 ccw(c566.75,2332.52) 566.75,2324.77 610.19,2324.77 ccw(c610.19,2332.52) 615.65,2327.02 632.18,2343.54 ccw(c626.68,2349.01) 634.43,2349.01 634.43,2417.52 ccw(c626.68,2417.52) 618.93,2417.52 618.93,2355.43 cw(c611.18,2355.43) 616.68,2349.96 609.23,2342.52 cw(c603.77,2348.02) 603.77,2340.27 573.17,2340.27 cw(c573.17,2348.02) 567.71,2342.52 561.69,2348.53 cw(c567.19,2353.99) 572.65,2359.49 574.13,2358.02 ccw(c579.59,2363.52) 579.59,2355.77 595.68,2355.77 ccw(c595.68,2363.52) 603.43,2363.52 603.43,2366.27 ccw(c595.68,2366.27) 595.68,2374.02 555.1,2374.02 cw(c555.1,2381.77) 555.1,2389.52 600.68,2389.52 ccw(c600.68,2397.27) 600.68,2405.02 559.87,2405.02 cw(c559.87,2412.77) 559.87,2420.52 595.68,2420.52 ccw(c595.68,2428.27) 603.43,2428.27 603.43,2435.25 cw(c611.18,2435.25) 611.18,2443 626.68,2443 ccw(c626.68,2450.75) 634.43,2450.75 634.43,2456.23 v1(653.99,2475.79)
  SIG6 w6: v1(765.52,2475.39) 775.64,2465.27 775.64,2394.09 787.57,2382.16 ccw(c795.74,2390.38) 795.74,2378.78 829.48,2378.78 cw(c829.48,2370.78) 837.48,2370.78 837.48,2338.78 cw(c829.48,2338.78) 829.48,2330.78 827.81,2330.78 ccw(c827.81,2322.78) 827.81,2314.78 845.48,2314.78 cw(c845.48,2306.78) 853.48,2306.78 853.48,2290.78 ccw(c861.48,2290.78) 861.48,2282.78 889.77,2282.78 ccw(c889.77,2290.78) 897.77,2290.78 ccw(c889.77,2290.78) 889.77,2298.78 877.48,2298.78 cw(c877.48,2306.78) 869.48,2306.78 cw(c877.48,2306.78) 877.48,2314.78 887.57,2314.78 ccw(c887.57,2322.78) 895.57,2322.78 ccw(c887.57,2322.78) 887.57,2330.78 861.48,2330.78 cw(c861.48,2338.78) 853.48,2338.78 853.48,2370.78 cw(c861.48,2370.78) 861.48,2378.78 872.38,2378.78 ccw(c872.38,2386.78) 878.05,2381.14 885.58,2388.67 898.78,2401.87 1088.46,2401.87 cw(c1088.46,2393.54) 1096.8,2393.54 1096.8,2322.22 ccw(c1106.38,2322.17) 1115.96,2322.22 1115.96,2391.34 cw(c1126.23,2391.31) 1136.51,2391.34 1136.51,2372.84 ccw(c1144.51,2372.84) 1152.51,2372.84 1152.51,2394.77 cw(c1161.61,2394.74) 1170.72,2394.77 1170.72,2373.03 1170.72,2324.03 ccw(c1179.39,2323.99) 1188.06,2324.03 1188.06,2392.4 cw(c1197.54,2392.4) 1197.54,2401.87 1372.18,2401.87 1378.64,2408.33 1412.51,2408.33 1423.29,2419.12 1427.23,2419.12 cw(c1427.23,2411.12) 1435.23,2411.12 1435.23,2401.86 ccw(c1443.23,2401.86) 1451.23,2401.86 1451.23,2411.33 cw(c1459.23,2411.33) 1467.23,2411.33 1467.23,2401.86 ccw(c1475.23,2401.86) 1483.23,2401.86 1483.23,2415.19 cw(c1491.23,2415.19) 1499.23,2415.19 1499.23,2401.86 ccw(c1507.23,2401.86) 1515.23,2401.86 1515.23,2411.12 cw(c1523.23,2411.12) 1523.23,2419.12 1586.96,2419.12 v2(1612.9,2445.06)
G4: J600.25 U604.2 U604.9 U1200.K14 | length 2846.5
  SIG1 w5.5: U604.9@717.77,2513.42 735.12,2513.42 741.77,2506.76 741.77,2496.43 746.85,2491.36 758.22,2491.36 765.92,2499.06 765.92,2515.48 744.61,2536.79 cw(c750.11,2542.25) 755.57,2547.75 766.98,2536.34 ccw(c772.48,2541.8) 777.94,2547.3 765.21,2560.03 cw(c770.71,2565.49) 776.17,2570.99 789.69,2557.47 ccw(c795.19,2562.93) 800.65,2568.43 781.9,2587.18 cw(c787.41,2592.64) 792.86,2598.14 816.67,2574.34 ccw(c822.16,2579.8) 827.62,2585.3 798.71,2614.22 cw(c804.22,2619.67) 809.67,2625.18 830.19,2604.65 ccw(c835.67,2610.13) 841.15,2604.65 876.35,2639.84 908.78,2639.84 v1@909.55,2639.07 ; v2@1848.52,2558.04 1863.34,2558.04 1872.77,2567.48 1960.05,2567.48 1975.72,2583.15 1975.72,2624.47 U1200.K14@1988.56,2637.3
  SIG1 w6: v1(514.16,2439.94) J600.25@579.29,2439.94 ; v1@655.74,2513.42 U604.2@683.32,2513.42 U604.9@717.77,2513.42
  SIG3 w5.5: v1(514.16,2439.94) 499.01,2424.79 491.57,2424.79 488.82,2424.79 ccw(c488.82,2417.04) 481.07,2417.04 481.07,2405.65 cw(c473.32,2405.65) 465.57,2405.65 465.57,2425.6 ccw(c457.82,2425.6) 450.07,2425.6 450.07,2406.88 cw(c442.32,2406.88) 434.57,2406.88 434.57,2417.04 ccw(c426.82,2417.04) 426.82,2424.79 421.3,2424.79 412.8,2433.3 412.8,2452.53 420.2,2459.94 435.64,2459.94 ccw(c435.64,2466.98) 442.68,2466.98 442.68,2483.09 cw(c450.43,2483.09) 458.18,2483.09 458.18,2456.04 ccw(c465.93,2456.04) 473.68,2456.04 473.68,2488.81 cw(c481.43,2488.81) 489.18,2488.81 489.18,2462.4 ccw(c496.93,2462.4) 504.68,2462.4 504.68,2473.52 cw(c512.43,2473.52) 520.18,2473.52 520.18,2466.98 ccw(c527.93,2466.98) 527.93,2459.23 601.55,2459.23 v1(653.99,2511.67)
  SIG6 w4: 1588.94,2668.66 1597.94,2668.66 1698.96,2567.65 1803.76,2567.65 1805.24,2569.12 1805.82,2569.12 1810.21,2573.52 1810.21,2574.09 1810.43,2574.31 1831.08,2574.31 v2(1846.82,2558.56)
  SIG6 w5: 1018.98,2631.12 1038.41,2631.12 ccw(c1038.41,2638.62) 1045.91,2638.62 1045.91,2646.51 cw(c1053.41,2646.51) 1060.91,2646.51 1060.91,2638.62 ccw(c1069.14,2638.62) 1067.1,2630.64 1124.76,2630.64 ccw(c1122.71,2638.62) 1130.95,2638.62 1130.95,2646.51 cw(c1138.45,2646.51) 1145.95,2646.51 1145.95,2638.62 ccw(c1153.71,2638.62) 1153.71,2630.85 1192.9,2630.85 ccw(c1192.9,2638.62) 1200.67,2638.62 1200.67,2646.51 cw(c1208.17,2646.51) 1215.67,2646.51 1215.67,2638.62 ccw(c1224.22,2638.62) 1221.14,2630.64 1280.44,2630.64 ccw(c1277.36,2638.62) 1285.91,2638.62 1285.91,2646.51 cw(c1293.41,2646.51) 1300.91,2646.51 1300.91,2638.62 ccw(c1308.41,2638.62) 1308.41,2631.12 1340.11,2631.12 1359.89,2650.9 1377.55,2650.9 1395.31,2668.66 1588.94,2668.66
  SIG6 w5.5: v1(909.55,2645.07) 933.74,2645.07 ccw(c933.74,2652.82) 941.49,2652.82 941.49,2676.7 cw(c949.24,2676.7) 956.99,2676.7 956.99,2642.56 ccw(c964.74,2642.56) 972.49,2642.56 972.49,2676.7 cw(c980.24,2676.7) 987.99,2676.7 987.99,2652.82 ccw(c995.74,2652.82) 995.74,2645.07 1005.04,2645.07 1018.98,2631.12
G5: J600.23 U603.5 U603.6 U1200.J14 | length 2972.5
  SIG1 w5.5: U603.6@717.77,2564.36 742.76,2564.36 ; 742.76,2564.15 764.7,2586.09 764.7,2609.46 794.4,2639.16 852.01,2639.16 874.51,2661.65 v1@892.26,2661.65 ; v2(1854.76,2578.58) 1856.35,2576.98 1905.37,2576.98 1912.9,2584.51 1912.9,2613.39 1921.17,2621.66 1941.42,2621.66 U1200.J14@1957.06,2637.3
  SIG1 w6: v1@536.18,2479.31 J600.23@579.29,2479.31 ; v1@655.74,2564.36 U603.5@683.32,2564.36 U603.6@717.77,2564.36
  SIG3 w5.5: v1(536.03,2479.16) 559.77,2479.16 ccw(c559.77,2486.91) 565.25,2492.39 563.57,2494.06 cw(c569.07,2499.53) 574.53,2505.02 598.71,2480.85 ccw(c604.19,2486.33) 609.67,2480.85 ccw(c604.19,2486.33) 609.67,2491.81 ; v1(653.99,2562.61) 655.38,2564 784.43,2564 798.2,2550.24 798.2,2539.85 798.2,2537.1 ccw(c805.95,2537.1) 805.95,2529.35 814.51,2529.35 cw(c814.51,2521.6) 814.51,2513.85 804.16,2513.85 ccw(c804.16,2506.1) 804.16,2498.35 816.15,2498.35 cw(c816.15,2490.6) 816.15,2482.85 805.95,2482.85 ccw(c805.95,2475.1) 798.2,2475.1 798.2,2454.05 cw(c790.03,2453.46) 781.85,2453.45 781.85,2543.74 ccw(c774.01,2543.74) 766.17,2543.74 766.17,2499 cw(c758.33,2498.97) 750.49,2499.01 750.49,2526.88 ccw(c741.8,2526.85) 733.11,2526.88 733.11,2474.82 cw(c725.36,2474.82) 717.61,2474.82 717.61,2526.6 ccw(c709.86,2526.6) 702.11,2526.6 702.11,2515.73 cw(c694.36,2515.73) 688.88,2510.25 667.52,2531.61 638.84,2531.61 cw(c638.84,2539.36) 633.36,2533.88 ; 594.28,2507.19 cw(c599.78,2512.66) 605.24,2518.15 ; 594.28,2507.19 cw(c599.78,2512.66) 605.24,2518.15 ; 594.28,2507.19 609.67,2491.81 ; 594.28,2507.19 609.67,2491.81 ; 605.24,2518.15 620.63,2502.77 ; 605.24,2518.15 620.63,2502.77 ; 616.2,2529.11 cw(c621.7,2534.58) 627.16,2540.07 ; 616.2,2529.11 cw(c621.7,2534.58) 627.16,2540.07 ; 616.2,2529.11 631.59,2513.73 ; 616.2,2529.11 631.59,2513.73 ; 620.63,2502.77 ccw(c626.11,2508.25) 631.59,2502.77 ccw(c626.11,2508.25) 631.59,2513.73 ; 627.16,2540.07 633.36,2533.88 ; 627.16,2540.07 633.36,2533.88
  SIG6 w4: 1588.42,2679.49 1598.63,2679.49 1701.5,2576.62 1800.86,2576.62 1811.35,2587.11 1846.23,2587.11 v2(1854.76,2578.58)
  SIG6 w5: 1387.12,2679.49 1588.42,2679.49
  SIG6 w5.5: v1@889.88,2664.2 899.77,2674.09 ccw(c894.29,2679.57) 899.74,2685.07 cw(c905.25,2690.53) 910.76,2695.98 ccw(c916.21,2701.49) 921.67,2695.99 925.25,2699.56 ccw(c919.77,2705.05) 927.52,2705.05 927.52,2708.64 cw(c935.27,2708.64) 943.02,2708.64 ccw(c950.77,2708.64) 958.52,2708.64 cw(c966.27,2708.64) 974.02,2708.64 ccw(c981.77,2708.64) 989.52,2708.64 cw(c997.27,2708.64) 997.27,2716.39 1022.69,2716.39 cw(c1022.69,2708.64) 1028.15,2714.14 1036.04,2706.25 cw(c1030.58,2700.75) 1025.08,2695.29 1021.73,2698.64 ccw(c1016.27,2693.14) 1016.27,2700.89 1012.77,2700.89 ccw(c1012.77,2693.14) 1005.02,2693.14 ccw(c1012.77,2693.14) 1012.77,2685.39 cw(c1008.68,2678.81) 1014.14,2684.31 1026.69,2671.75 ccw(c1032.16,2677.25) 1037.66,2671.79 cw(c1043.12,2666.29) 1048.58,2671.79 1057.61,2662.76 1220.65,2662.76 ccw(c1220.65,2670.51) 1228.4,2670.51 1228.4,2673.93 cw(c1236.15,2673.93) 1243.9,2673.93 1243.9,2670.51 ccw(c1251.65,2670.51) 1251.65,2662.76 1324.73,2662.76 ccw(c1324.73,2670.51) 1332.48,2670.51 1332.48,2678.22 cw(c1340.23,2678.22) 1347.98,2678.22 1347.98,2670.51 ccw(c1355.73,2670.51) 1355.73,2662.76 1370.39,2662.76 1387.12,2679.49
  other v1: 891.55,2661.65
G6: J600.22 U603.4 U603.7 U1200.J15 | length 2852.2
  SIG1 w6: v1(514.16,2498.99) J600.22@579.29,2498.99 ; v1@655.74,2584.05 U603.4@683.32,2584.05 U603.7@717.77,2584.05 736.84,2584.05 748.29,2595.5 748.29,2613.45 760.3,2625.45 ccw(c754.82,2630.93) 760.3,2636.41 748.29,2648.42 cw(c753.78,2653.88) 759.25,2659.38 771.26,2647.37 ccw(c776.74,2652.85) 782.22,2647.37 790.96,2656.11 851.24,2656.11 921.79,2726.66 921.79,2773.54 920.07,2775.26 v2(919.75,2775.26) ; U1200.J15@1957.06,2668.8 v2(1972.81,2684.55)
  SIG3 w5.5: v1(514.16,2498.99) 542.58,2498.99 564.17,2520.58 ccw(c558.69,2526.06) 564.17,2531.54 563.1,2532.61 cw(c568.6,2538.07) 574.06,2543.57 583.72,2533.9 ccw(c589.23,2539.35) 594.68,2544.86 583.97,2555.58 cw(c589.47,2561.04) 594.93,2566.54 605.68,2555.79 ccw(c611.18,2561.24) 616.64,2566.75 605.96,2577.42 cw(c611.53,2583) 617.73,2587.86 ccw(c622.72,2592.85) 622.72,2585.79 v1(653.99,2585.79) ; v2(1879.74,2769.73) 1963.85,2685.61 v2@1972.22,2685.61
  SIG6 w4: 1634,2783.08 1669.31,2747.76 ccw(c1673.55,2752) 1677.8,2747.76 1679.26,2749.22 cw(c1683.5,2744.98) 1687.74,2749.22 cw(c1683.5,2744.98) 1687.74,2740.73 1684.8,2737.79 ccw(c1689.04,2733.55) 1684.8,2729.31 ccw(c1689.04,2733.55) 1693.29,2729.31 1694.23,2730.25 cw(c1698.47,2726.01) 1702.71,2730.25 cw(c1698.47,2726.01) 1702.71,2721.76 1701.77,2720.82 ccw(c1706.01,2716.58) 1701.77,2712.34 ccw(c1706.01,2716.58) 1710.26,2712.34 1717.13,2719.21 cw(c1721.34,2715) 1725.39,2710.64 ccw(c1729.67,2706.35) 1729.67,2700.29 1771.82,2700.29 ccw(c1771.82,2706.29) 1777.82,2706.29 1777.82,2714.04 cw(c1783.82,2714.04) 1789.82,2714.04 1789.82,2703.48 ccw(c1795.82,2703.48) 1801.82,2703.48 1801.82,2714.04 cw(c1807.82,2714.04) 1813.82,2714.04 ccw(c1819.15,2713.92) 1822.93,2710.14 1879.07,2766.28 v2@1879.07,2770.23
  SIG6 w5.5: 1254.11,2812.44 ccw(c1259.42,2817.74) 1264.73,2812.44 1272.84,2820.55 cw(c1278.23,2815.21) 1283.58,2809.82 1272.91,2799.14 ccw(c1278.39,2793.66) 1272.91,2788.18 1278.01,2783.08 1451.98,2783.08 cw(c1451.98,2775.33) 1459.73,2775.33 1459.73,2769.89 ccw(c1467.48,2769.89) 1475.23,2769.89 1475.23,2774.28 cw(c1482.98,2774.28) 1490.73,2774.28 1490.73,2769.89 ccw(c1498.48,2769.89) 1506.23,2769.89 1506.23,2774.46 cw(c1513.98,2774.46) 1521.73,2774.46 1521.73,2769.89 ccw(c1529.48,2769.89) 1537.23,2769.89 1537.23,2775.33 cw(c1544.98,2775.33) 1544.98,2783.08 1634,2783.08
  SIG6 w6: v2(919.75,2775.26) 937.83,2793.34 ccw(c932.17,2798.99) 937.83,2804.65 929.17,2813.31 ccw(c923.51,2807.66) 917.85,2813.31 905.16,2800.62 cw(c899.51,2806.28) 893.85,2811.93 906.54,2824.63 ccw(c900.88,2830.28) 906.54,2835.94 896.63,2845.85 cw(c900.99,2852.67) 906.71,2858.4 916.17,2848.94 918.29,2846.82 ccw(c923.95,2852.48) 929.6,2846.82 935.08,2852.29 cw(c940.74,2846.64) 946.39,2840.98 940.92,2835.51 ccw(c946.57,2829.85) 940.92,2824.19 949.14,2815.96 ccw(c954.8,2821.62) 960.46,2815.96 967.68,2823.18 967.68,2857.79 cw(c976.16,2857.76) 984.64,2857.79 984.64,2835.1 ccw(c992.64,2835.1) 1000.64,2835.1 1000.64,2864.81 cw(c1008.64,2864.81) 1016.64,2864.81 1016.64,2836 ccw(c1024.64,2836) 1032.64,2836 1032.64,2862.62 cw(c1040.64,2862.62) 1048.64,2862.62 1048.64,2833.3 ccw(c1056.64,2833.3) 1064.64,2833.3 1064.64,2856.2 cw(c1072.64,2856.2) 1080.64,2856.2 1080.64,2830.19 ccw(c1089.16,2830.16) 1097.68,2830.19 cw(c1105.49,2831.82) 1105.49,2839.8 1154.09,2839.8 1165.55,2828.34 ccw(c1173.42,2836.22) 1181.3,2828.34 1213.19,2860.23 cw(c1219.52,2854.56) 1225.53,2848.55 1212.89,2835.91 ccw(c1218.55,2830.26) 1224.2,2824.6 1227.42,2827.81 cw(c1233.08,2822.16) 1238.73,2827.81 1254.11,2812.44
G7: J600.21 U603.2 U603.9 U1200.B12 | length 2848.4
  SIG1 w4: v2(1643.91,2568.83) 1683.14,2568.83 1689.61,2562.37 1724.64,2562.37 U1200.B12@1736.59,2574.31
  SIG1 w6: v1(536.03,2518.53) J600.21@579.14,2518.53 ; v1@655.74,2623.42 U603.2@683.32,2623.42 U603.9@717.77,2623.42 733.17,2623.42 737.52,2627.77 v1(740.89,2627.77) v1@740.89,2630.45
  SIG3 w5.5: v1(536.03,2518.53) 536.03,2531.86 625.83,2621.67 v1(653.99,2621.67) ; v1(740.89,2627.77) 754.33,2627.77 759.82,2622.27 759.82,2612.78 ccw(c767.57,2612.78) 775.32,2612.78 775.32,2622.27 cw(c783.07,2622.27) 790.82,2622.27 790.82,2613.92 ccw(c798.57,2613.92) 806.32,2613.92 806.32,2623.41 cw(c814.07,2623.41) 821.82,2623.41 821.82,2615.06 ccw(c829.57,2615.06) 829.57,2607.31 832.75,2607.31 cw(c832.75,2598.99) 832.75,2590.67 772.5,2590.67 ccw(c772.5,2582.92) 772.5,2575.17 790.92,2575.17 836.97,2529.12 836.97,2466.68 797.26,2426.96 774.6,2426.96 769.73,2422.1 ccw(c775.21,2416.61) 769.73,2411.13 cw(c764.53,2405.39) 759.04,2399.91 750.59,2408.36 ccw(c745.13,2402.85) 739.63,2397.4 749.24,2387.79 cw(c743.78,2382.29) 738.28,2376.83 728.25,2386.86 ccw(c722.79,2381.36) 717.29,2375.9 727.58,2365.61 cw(c722.13,2360.1) 716.62,2354.65 707.05,2364.22 ccw(c701.59,2358.71) 696.09,2353.26 705.98,2343.37 cw(c700.51,2337.87) 695.02,2332.41 687.61,2339.81 ccw(c682.54,2334.72) 677.44,2329.64 685.54,2321.54 685.54,2312.57 680.72,2307.74 654.65,2307.74 626.81,2279.9 ccw(c632.84,2273.86) 638.87,2267.83 664.08,2293.03 702.75,2293.03 702.86,2293.14 713.13,2282.87 ccw(c718.65,2288.32) 724.09,2293.83 713.47,2304.45 cw(c718.69,2309.67) 713.47,2314.89 748.65,2350.07 cw(c754.22,2344.5) 759.79,2350.07 768.76,2341.11 ccw(c774.26,2346.56) 779.72,2352.07 772.6,2359.19 cw(c778.1,2364.65) 783.56,2370.15 790.57,2363.13 ccw(c796.07,2368.59) 801.53,2374.09 794.89,2380.74 cw(c800.39,2386.2) 805.85,2391.7 812.34,2385.21 ccw(c817.83,2390.67) 823.3,2396.17 815.02,2404.45 cw(c820.5,2409.93) 815.02,2415.41 cw(c820.5,2409.93) 825.98,2415.41 835.05,2406.34 ccw(c840.54,2411.8) 846.01,2417.3 841.74,2421.57 cw(c847.22,2427.05) 841.74,2432.53 854.79,2445.58 854.79,2591.29 v1(863.46,2599.97)
  SIG6 w4: 1606.84,2583.75 1621.76,2568.83 v2(1643.91,2568.83)
  SIG6 w5: 941.04,2600.71 1369.22,2600.71 1384.77,2616.26 1400.39,2616.26 1418.97,2634.84 1508.87,2634.84 1554.49,2589.22 ccw(c1559.8,2594.52) 1567.3,2594.52 1567.3,2608.12 cw(c1574.8,2608.12) 1582.3,2608.12 1582.3,2591.25 ccw(c1589.8,2591.25) 1589.8,2583.75 1606.84,2583.75
  SIG6 w5.5: v1@868.72,2595.3 935.64,2595.3 941.04,2600.71